# Altium PCB main.PcbDoc
Units mil, origin at the board's own origin, x right, y up, seen from the top; angles counter-clockwise.
Board outline 6000 x 4000 mil, 2 copper layers (Top Layer, Bottom Layer); 171 components, 206 nets, 905 pads, 0 vias.
Unrouted connection lines stored in the file: 298.
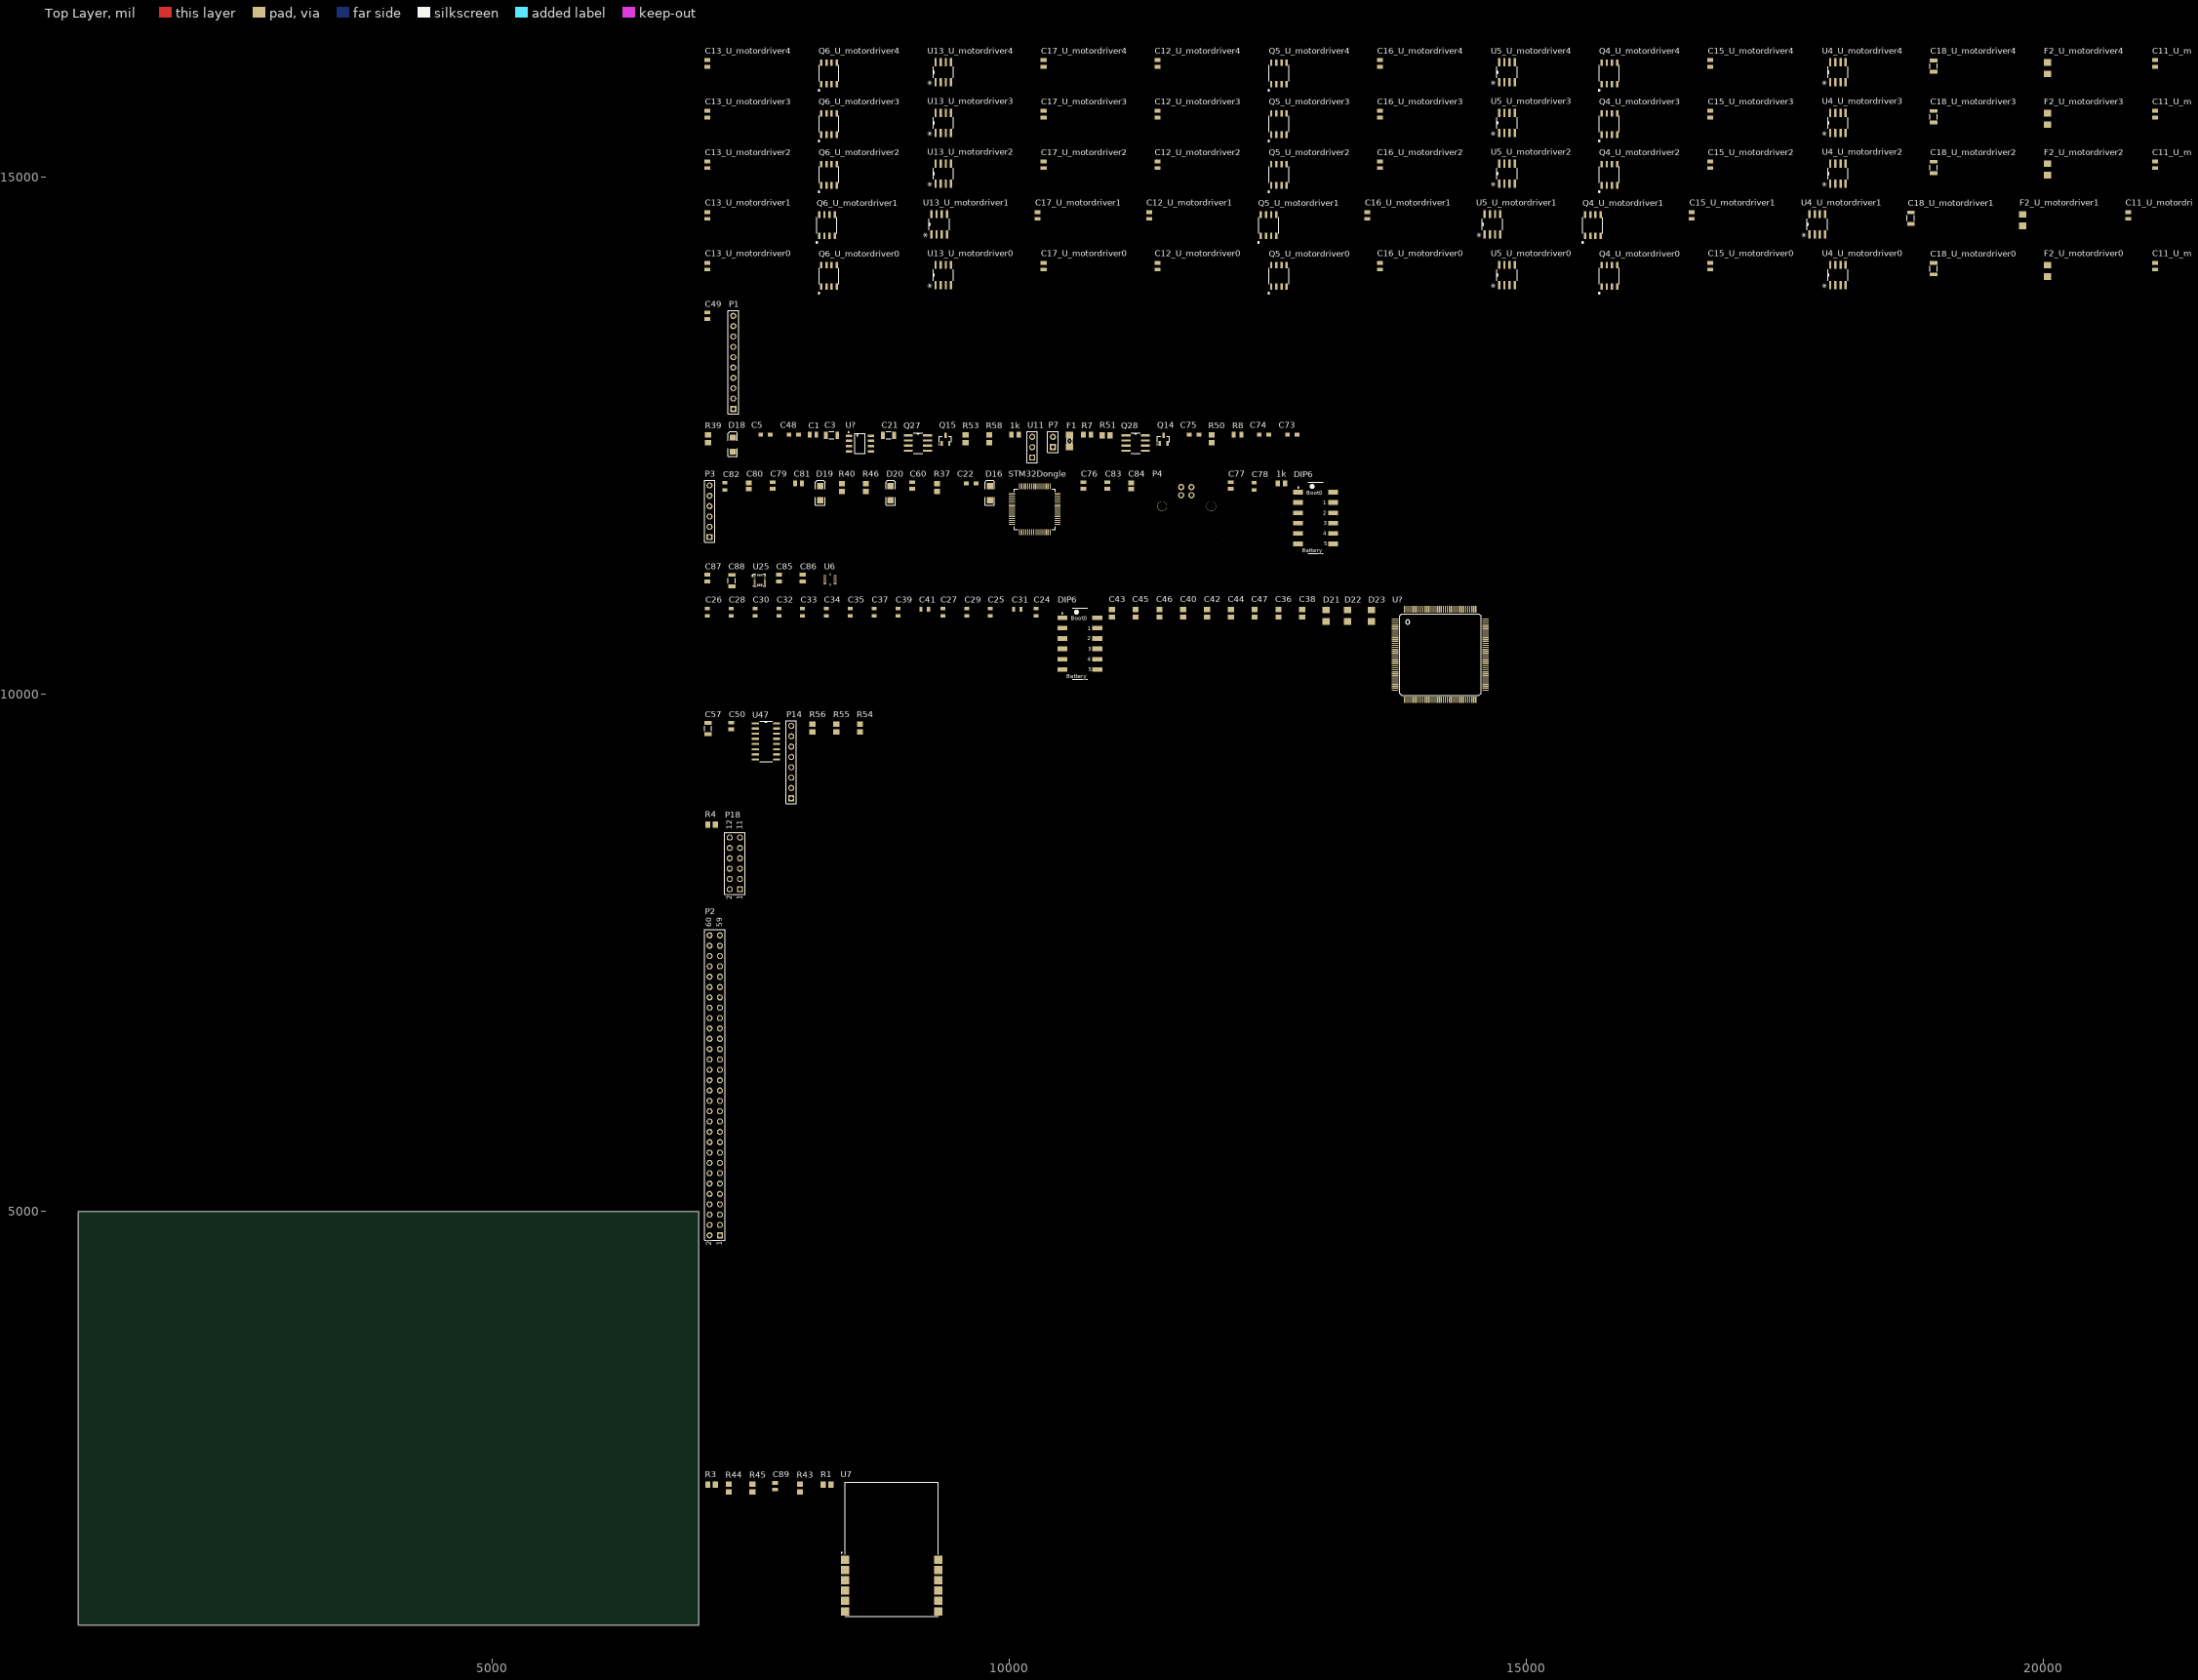
[diagram p0: Top Layer view]
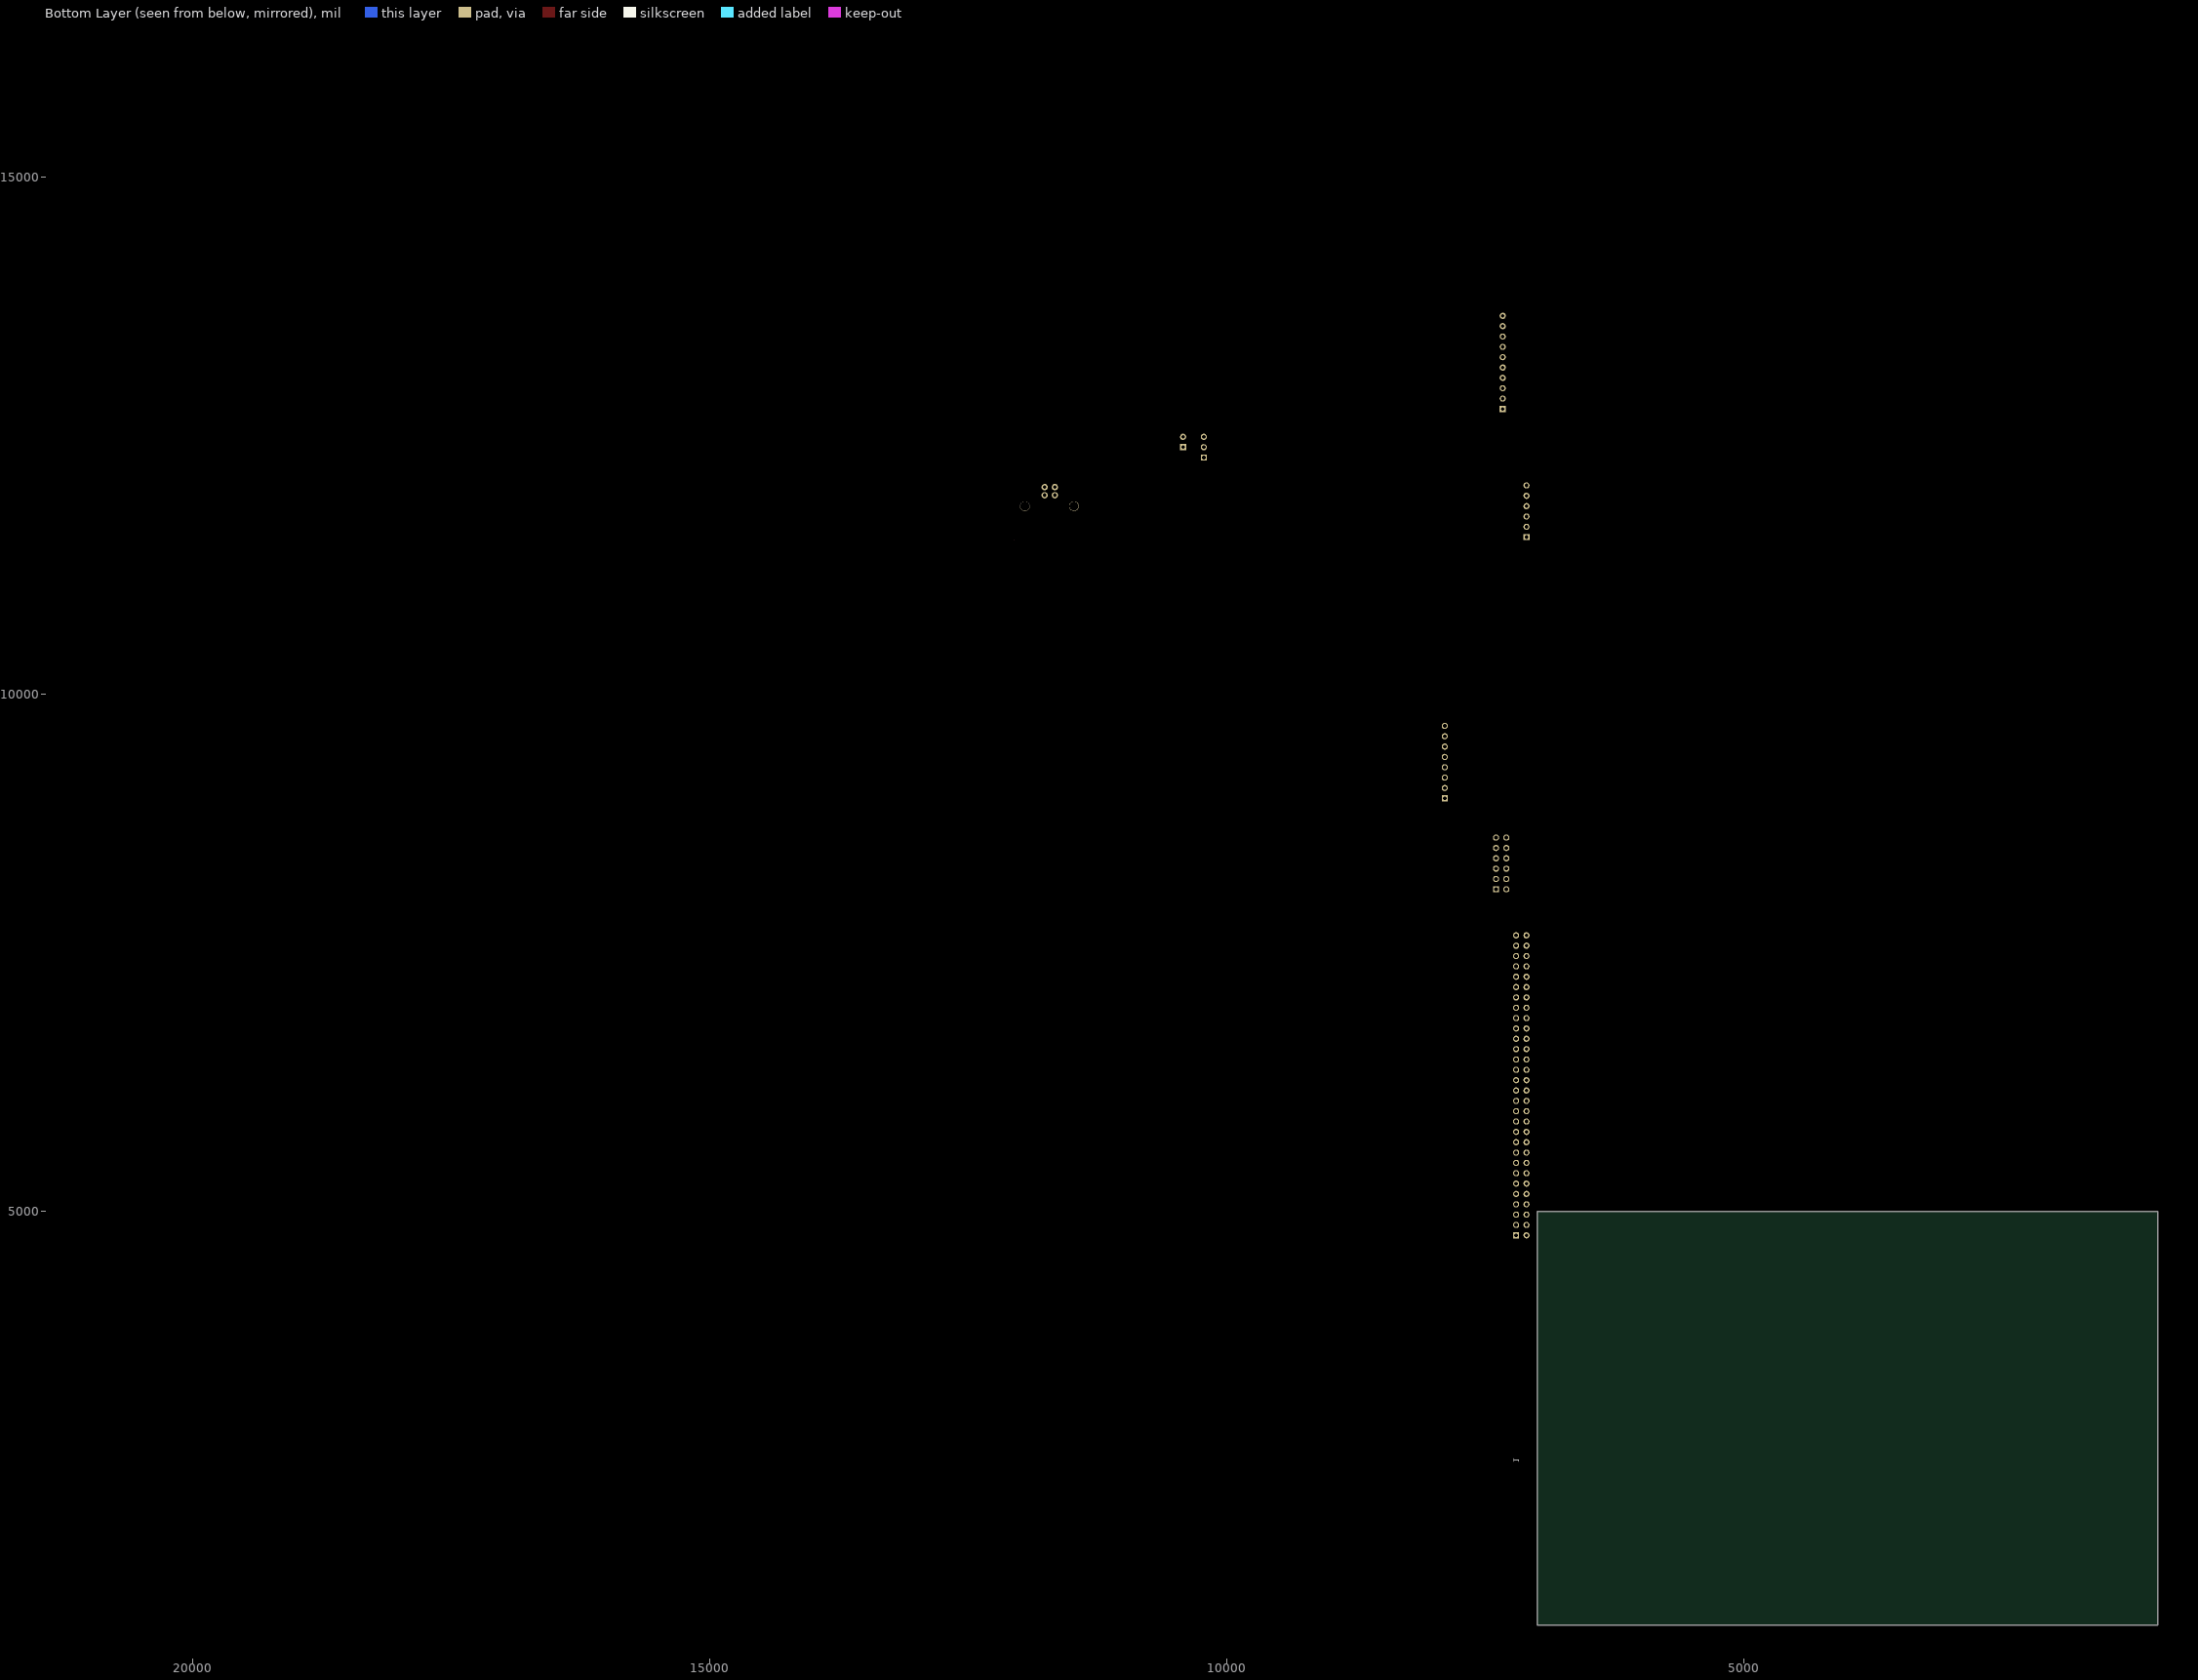
[diagram p1: Bottom Layer view, seen from below]

## Layer stack, top to bottom
Top Solder: solder mask 0.4, Solder Resist, Dk 3.5
Top Layer: signal copper 1.4
Dielectric 1: dielectric 12.6, FR-4, Dk 4.8
Bottom Layer: signal copper 1.4
Bottom Solder: solder mask 0.4, Solder Resist, Dk 3.5

## Board outline
1000,1000 7000,1000 7000,5000 1000,5000

## Design rules (kind name [scope] priority, off if disabled: settings)
Clearance [All] p1: gap=10
PolygonConnect [All] p1: connectstyle=Relief reliefconductorwidth=10 reliefentries=4 polygonreliefangle="90 Angle" airgapwidth=10
RoomDefinition U_sdcard [InComponentClass('U_sdcard')] p1: confinementstyle=ConfineIn formatcopy=TRUE lockcomponents=FALSE outline 7045,12700 7395,12700 7395,13820 7045,13820
RoomDefinition U_Power [InComponentClass('U_Power')] p2: confinementstyle=ConfineIn formatcopy=TRUE lockcomponents=FALSE outline 7045,9905 14650,9905 14650,12650 7045,12650
RoomDefinition U_motordriver4 [InComponentClass('U_motordriver4')] p3: confinementstyle=ConfineIn formatcopy=TRUE lockcomponents=FALSE outline 7045,15825 22095,15825 22095,16270 7045,16270
RoomDefinition U_motordriver3 [InComponentClass('U_motordriver3')] p4: confinementstyle=ConfineIn formatcopy=TRUE lockcomponents=FALSE outline 7045,15335 22095,15335 22095,15780 7045,15780
RoomDefinition U_motordriver2 [InComponentClass('U_motordriver2')] p5: confinementstyle=ConfineIn formatcopy=TRUE lockcomponents=FALSE outline 7045,14845 22095,14845 22095,15290 7045,15290
RoomDefinition U_motordriver1 [InComponentClass('U_motordriver1')] p6: confinementstyle=ConfineIn formatcopy=TRUE lockcomponents=FALSE outline 7045,14355 21815,14355 21815,14800 7045,14800
RoomDefinition U_motordriver0 [InComponentClass('U_motordriver0')] p7: confinementstyle=ConfineIn formatcopy=TRUE lockcomponents=FALSE outline 7045,13865 22095,13865 22095,14310 7045,14310
RoomDefinition U_microcontroller [InComponentClass('U_microcontroller')] p8: confinementstyle=ConfineIn formatcopy=TRUE lockcomponents=FALSE outline 7045,10115 13195,10115 13195,12650 7045,12650
RoomDefinition U_IMU [InComponentClass('U_IMU')] p9: confinementstyle=ConfineIn formatcopy=TRUE lockcomponents=FALSE outline 7045,11015 8345,11015 8345,11285 7045,11285
RoomDefinition U_fpga [InComponentClass('U_fpga')] p10: confinementstyle=ConfineIn formatcopy=TRUE lockcomponents=FALSE outline 7045,9905 14650,9905 14650,12650 7045,12650
RoomDefinition U_dribblerconn [InComponentClass('U_dribblerconn')] p11: confinementstyle=ConfineIn formatcopy=TRUE lockcomponents=FALSE outline 7045,8935 8710,8935 8710,9855 7045,9855
RoomDefinition U_chicker [InComponentClass('U_chicker')] p12: confinementstyle=ConfineIn formatcopy=TRUE lockcomponents=FALSE outline 7045,8000 7460,8000 7460,8885 7045,8885
RoomDefinition U_breakoutconn [InComponentClass('U_breakoutconn')] p13: confinementstyle=ConfineIn formatcopy=TRUE lockcomponents=FALSE outline 7045,2555 7265,2555 7265,7950 7045,7950
RoomDefinition main [InComponentClass('main')] p14: confinementstyle=ConfineIn formatcopy=TRUE lockcomponents=FALSE outline 7045,1060 9375,1060 9375,2505 7045,2505
RoutingVias [All] p1: holewidth=28 width=50 viastyle="Through Hole" minholewidth=28 minwidth=50 maxholewidth=28 maxwidth=50
SolderMaskExpansion [All] p1: expansion=4
Width [All] p1: maxlimit=10 minlimit=10 preferedwidth=10
30 further rules are at their usual default settings.

## Classes and differential pairs
channel class motordriver: U_motordriver0 U_motordriver1 U_motordriver2 U_motordriver3 U_motordriver4
component class U_sdcard: C49 P1
component class U_Power: 1k C1 C3 C5 C14 C21 C48 C73 C74 C75 D3 D18 D24 F1 P7 Q14 Q15 Q27 Q28 R6 R7 R8 R39 R50 R51 R53 R58 Toggle U10 U11 U23 U?
component class U_motordriver4: C11_U_motordriver4 C12_U_motordriver4 C13_U_motordriver4 C15_U_motordriver4 C16_U_motordriver4 C17_U_motordriver4 C18_U_motordriver4 F2_U_motordriver4 Q4_U_motordriver4 Q5_U_motordriver4 Q6_U_motordriver4 U4_U_motordriver4 U5_U_motordriver4 U13_U_motordriver4
component class U_motordriver3: C11_U_motordriver3 C12_U_motordriver3 C13_U_motordriver3 C15_U_motordriver3 C16_U_motordriver3 C17_U_motordriver3 C18_U_motordriver3 F2_U_motordriver3 Q4_U_motordriver3 Q5_U_motordriver3 Q6_U_motordriver3 U4_U_motordriver3 U5_U_motordriver3 U13_U_motordriver3
component class U_motordriver2: C11_U_motordriver2 C12_U_motordriver2 C13_U_motordriver2 C15_U_motordriver2 C16_U_motordriver2 C17_U_motordriver2 C18_U_motordriver2 F2_U_motordriver2 Q4_U_motordriver2 Q5_U_motordriver2 Q6_U_motordriver2 U4_U_motordriver2 U5_U_motordriver2 U13_U_motordriver2
component class U_motordriver1: C11_U_motordriver1 C12_U_motordriver1 C13_U_motordriver1 C15_U_motordriver1 C16_U_motordriver1 C17_U_motordriver1 C18_U_motordriver1 F2_U_motordriver1 Q4_U_motordriver1 Q5_U_motordriver1 Q6_U_motordriver1 U4_U_motordriver1 U5_U_motordriver1 U13_U_motordriver1
component class U_motordriver0: C11_U_motordriver0 C12_U_motordriver0 C13_U_motordriver0 C15_U_motordriver0 C16_U_motordriver0 C17_U_motordriver0 C18_U_motordriver0 F2_U_motordriver0 Q4_U_motordriver0 Q5_U_motordriver0 Q6_U_motordriver0 U4_U_motordriver0 U5_U_motordriver0 U13_U_motordriver0
component class U_microcontroller: 1k C22 C60 C76 C77 C78 C79 C80 C81 C82 C83 C84 D16 D19 D20 DIP6 P3 P4 R37 R40 R46 STM32Dongle
component class U_IMU: C85 C86 C87 C88 U6 U25
component class U_fpga: C24 C25 C26 C27 C28 C29 C30 C31 C32 C33 C34 C35 C36 C37 C38 C39 C40 C41 C42 C43 C44 C45 C46 C47 D21 D22 D23 DIP6 U?
component class U_dribblerconn: C50 C57 P14 R54 R55 R56 U47
component class U_chicker: P18 R4
component class U_breakoutconn: P2
component class main: C89 R1 R3 R43 R44 R45 U7

## Components (designator, comment, footprint, x,y, rotation, side; value= is the part's Value field where it differs from the comment)
1k "R2" CAPC2012X140N 12635,12040 r0 top
1k "R52" CAPC2012X140N 10060,12510 r0 top
C1 "100nF" CAPC2013X110N 8105,12510 r0 top
C3 "10uF" CAPC3216X100N 8285,12505 r0 top
C5 "1uF" INDC2012X87N 7645,12510 r0 top
C11_U_motordriver0 "100nF" CAPC2013X110N 21080,14140 r90 top (schematic designator C11)
C11_U_motordriver1 "100nF" CAPC2013X110N 20820,14630 r90 top (schematic designator C11)
C11_U_motordriver2 "100nF" CAPC2013X110N 21080,15120 r90 top (schematic designator C11)
C11_U_motordriver3 "100nF" CAPC2013X110N 21080,15610 r90 top (schematic designator C11)
C11_U_motordriver4 "100nF" CAPC2013X110N 21080,16100 r90 top (schematic designator C11)
C12_U_motordriver0 "100nF" CAPC2013X110N 11435,14140 r90 top (schematic designator C12)
C12_U_motordriver1 "100nF" CAPC2013X110N 11355,14630 r90 top (schematic designator C12)
C12_U_motordriver2 "100nF" CAPC2013X110N 11435,15120 r90 top (schematic designator C12)
C12_U_motordriver3 "100nF" CAPC2013X110N 11435,15610 r90 top (schematic designator C12)
C12_U_motordriver4 "100nF" CAPC2013X110N 11435,16100 r90 top (schematic designator C12)
C13_U_motordriver0 "100nF" CAPC2013X110N 7085,14140 r90 top (schematic designator C13)
C13_U_motordriver1 "100nF" CAPC2013X110N 7085,14630 r90 top (schematic designator C13)
C13_U_motordriver2 "100nF" CAPC2013X110N 7085,15120 r90 top (schematic designator C13)
C13_U_motordriver3 "100nF" CAPC2013X110N 7085,15610 r90 top (schematic designator C13)
C13_U_motordriver4 "100nF" CAPC2013X110N 7085,16100 r90 top (schematic designator C13)
C15_U_motordriver0 "100nF" CAPC2013X110N 16780,14140 r90 top (schematic designator C15)
C15_U_motordriver1 "100nF" CAPC2013X110N 16600,14630 r90 top (schematic designator C15)
C15_U_motordriver2 "100nF" CAPC2013X110N 16780,15120 r90 top (schematic designator C15)
C15_U_motordriver3 "100nF" CAPC2013X110N 16780,15610 r90 top (schematic designator C15)
C15_U_motordriver4 "100nF" CAPC2013X110N 16780,16100 r90 top (schematic designator C15)
C16_U_motordriver0 "100nF" CAPC2013X110N 13585,14140 r90 top (schematic designator C16)
C16_U_motordriver1 "100nF" CAPC2013X110N 13465,14630 r90 top (schematic designator C16)
C16_U_motordriver2 "100nF" CAPC2013X110N 13585,15120 r90 top (schematic designator C16)
C16_U_motordriver3 "100nF" CAPC2013X110N 13585,15610 r90 top (schematic designator C16)
C16_U_motordriver4 "100nF" CAPC2013X110N 13585,16100 r90 top (schematic designator C16)
C17_U_motordriver0 "100nF" CAPC2013X110N 10335,14140 r90 top (schematic designator C17)
C17_U_motordriver1 "100nF" CAPC2013X110N 10275,14630 r90 top (schematic designator C17)
C17_U_motordriver2 "100nF" CAPC2013X110N 10335,15120 r90 top (schematic designator C17)
C17_U_motordriver3 "100nF" CAPC2013X110N 10335,15610 r90 top (schematic designator C17)
C17_U_motordriver4 "100nF" CAPC2013X110N 10335,16100 r90 top (schematic designator C17)
C18_U_motordriver0 "10uF" CAPC3216X100N 18940,14115 r90 top (schematic designator C18)
C18_U_motordriver1 "10uF" CAPC3216X100N 18720,14605 r90 top (schematic designator C18)
C18_U_motordriver2 "10uF" CAPC3216X100N 18940,15095 r90 top (schematic designator C18)
C18_U_motordriver3 "10uF" CAPC3216X100N 18940,15585 r90 top (schematic designator C18)
C18_U_motordriver4 "10uF" CAPC3216X100N 18940,16075 r90 top (schematic designator C18)
C21 "10uF" CAPC3216X100N 8835,12505 r0 top
C22 "1uF" INDC2012X87N 9635,12040 r0 top
C24 "4.7uF" 0805 10260,10795 r90 top
C25 "4.7uF" 0805 9820,10795 r90 top
C26 "4.7uF" 0805 7085,10795 r90 top
C27 "4.7uF" 0805 9360,10795 r90 top
C28 "4.7uF" 0805 7315,10795 r90 top
C29 "4.7uF" 0805 9590,10795 r90 top
C30 "4.7uF" 0805 7545,10795 r90 top
C31 "4.7uF" 0805 10080,10825 r0 top
C32 "4.7uF" 0805 7775,10795 r90 top
C33 "4.7uF" 0805 8005,10795 r90 top
C34 "4.7uF" 0805 8235,10795 r90 top
C35 "4.7uF" 0805 8465,10795 r90 top
C36 "470nF" CAPC2012X70 12605,10785 r90 top
C37 "4.7uF" 0805 8695,10795 r90 top
C38 "470nF" CAPC2012X70 12835,10785 r90 top
C39 "4.7uF" 0805 8925,10795 r90 top
C40 "470nF" CAPC2012X70 11685,10785 r90 top
C41 "4.7uF" 0805 9185,10825 r0 top
C42 "470nF" CAPC2012X70 11915,10785 r90 top
C43 "470nF" CAPC2012X70 10995,10785 r90 top
C44 "470nF" CAPC2012X70 12145,10785 r90 top
C45 "470nF" CAPC2012X70 11225,10785 r90 top
C46 "470nF" CAPC2012X70 11455,10785 r90 top
C47 "470nF" CAPC2012X70 12375,10785 r90 top
C48 "1uF" INDC2012X87N 7920,12510 r0 top
C49 "100nF" CAPC2013X110N 7085,13660 r90 top
C50 "100nF" CAPC2013X110N 7315,9695 r90 top
C57 "10uF" CAPC3216X100N 7090,9670 r90 top
C60 "100nF" CAPC2013X110N 9065,12020 r90 top
C73 "1uF" INDC2012X87N 12740,12510 r0 top
C74 "1uF" INDC2012X87N 12465,12510 r0 top
C75 "1uF" INDC2012X87N 11790,12510 r0 top
C76 "100nF" CAPC2013X110N 10720,12020 r90 top
C77 "100nF" CAPC2013X110N 12145,12020 r90 top
C78 "4.7uF" 0805 12370,12010 r90 top
C79 "100nF" CAPC2013X110N 7715,12020 r90 top
C80 "2.2uF 0805" C0805 7485,12015 r90 top
C81 "100nF" CAPC2013X110N 7965,12040 r0 top
C82 "4.7uF" 0805 7255,12010 r90 top
C83 "100nF" CAPC2013X110N 10950,12020 r90 top
C84 "2.2uF 0805" C0805 11180,12015 r90 top
C85 "100nF" CAPC2013X110N 7775,11125 r90 top
C86 "100nF" CAPC2013X110N 8005,11125 r90 top
C87 "100nF" CAPC2013X110N 7085,11125 r90 top
C88 "10uF" CAPC3216X100N 7320,11100 r90 top
C89 "100nF" CAPC2013X110N 7740,2345 r90 top
D16 "LED2" 3.2X1.6X1.1 9815,11945 r90 top
D18 "GREEN" 3.2X1.6X1.1 7330,12415 r90 top
D19 "LED2" 3.2X1.6X1.1 8175,11945 r90 top
D20 "LED2" 3.2X1.6X1.1 8855,11945 r90 top
D21 "LedYel - Test 0" 1206#1 13065,10760 r90 top
D22 "LedYel - Test 1" 1206#1 13275,10760 r90 top
D23 "LedYel - Test 2" 1206#1 13505,10760 r90 top
DIP6 "5pin1" SOJ254P980X912-12M 10685,10490 r0 top
DIP6 "Boot0" SOJ254P980X912-12M 12965,11705 r0 top
F1 "15A Fuse" 1206#2 10585,12450 r90 top
F2_U_motordriver0 "5AFast" 1206#3 20040,14095 r90 top (schematic designator F2)
F2_U_motordriver1 "5AFast" 1206#3 19800,14585 r90 top (schematic designator F2)
F2_U_motordriver2 "5AFast" 1206#3 20040,15075 r90 top (schematic designator F2)
F2_U_motordriver3 "5AFast" 1206#3 20040,15565 r90 top (schematic designator F2)
F2_U_motordriver4 "5AFast" 1206#3 20040,16055 r90 top (schematic designator F2)
P1 "Header 10" HDR1X10 7335,12760 r90 top
P2 "Header 30X2" HDR2X30 7205,4770 r90 top
P3 "Header 6" HDR1X6 7105,11520 r90 top
P4 "USB_B" PCBComponent_1 11155,11670 r0 top
P7 "BatteryIn" HDR1X2 10425,12390 r90 top
P14 "Header 8" HDR1X8 7895,8995 r90 top
P18 "Header 6X2" HDR2X6 7400,8115 r90 top
Q4_U_motordriver0 "Ao4882" SOIC127P490X600X175-8N 15805,14045 r90 top (schematic designator Q4)
Q4_U_motordriver1 "Ao4882" SOIC127P490X600X175-8N 15645,14535 r90 top (schematic designator Q4)
Q4_U_motordriver2 "Ao4882" SOIC127P490X600X175-8N 15805,15025 r90 top (schematic designator Q4)
Q4_U_motordriver3 "Ao4882" SOIC127P490X600X175-8N 15805,15515 r90 top (schematic designator Q4)
Q4_U_motordriver4 "Ao4882" SOIC127P490X600X175-8N 15805,16005 r90 top (schematic designator Q4)
Q5_U_motordriver0 "Ao4882" SOIC127P490X600X175-8N 12610,14045 r90 top (schematic designator Q5)
Q5_U_motordriver1 "Ao4882" SOIC127P490X600X175-8N 12510,14535 r90 top (schematic designator Q5)
Q5_U_motordriver2 "Ao4882" SOIC127P490X600X175-8N 12610,15025 r90 top (schematic designator Q5)
Q5_U_motordriver3 "Ao4882" SOIC127P490X600X175-8N 12610,15515 r90 top (schematic designator Q5)
Q5_U_motordriver4 "Ao4882" SOIC127P490X600X175-8N 12610,16005 r90 top (schematic designator Q5)
Q6_U_motordriver0 "Ao4882" SOIC127P490X600X175-8N 8260,14045 r90 top (schematic designator Q6)
Q6_U_motordriver1 "Ao4882" SOIC127P490X600X175-8N 8240,14535 r90 top (schematic designator Q6)
Q6_U_motordriver2 "Ao4882" SOIC127P490X600X175-8N 8260,15025 r90 top (schematic designator Q6)
Q6_U_motordriver3 "Ao4882" SOIC127P490X600X175-8N 8260,15515 r90 top (schematic designator Q6)
Q6_U_motordriver4 "Ao4882" SOIC127P490X600X175-8N 8260,16005 r90 top (schematic designator Q6)
Q14 "NMOS" SOT95P230X110-3N 11495,12465 r0 top
Q15 "NMOS" SOT95P230X110-3N 9385,12465 r0 top
Q27 "IRF9310TRPBFCT-ND" SOIC127P600X175-8N#1 9120,12430 r0 top
Q28 "IRF9310TRPBFCT-ND" SOIC127P600X175-8N#1 11225,12430 r0 top
R1 "10k" RESC2012X60 8240,2360 r0 top
R3 "100R" RESC2012X60 7125,2360 r0 top
R4 "100k" RESC2012X60 7125,8740 r0 top
R7 "1k" CAPC2012X140N 10755,12510 r0 top
R8 "1Mohm" RESC2013X65N 12210,12510 r0 top
R37 "100R" RESC2012X60 9305,12000 r90 top
R39 "100ohm" RESC2012X60 7090,12470 r90 top
R40 "100R" RESC2012X60 8385,12000 r90 top
R43 "100R" RESC2012X60 7980,2325 r90 top
R44 "10k" RESC2012X60 7290,2325 r90 top
R45 "2.2k" RESC2012X60 7520,2325 r90 top
R46 "100R" RESC2012X60 8615,12000 r90 top
R50 "10K" RESC2012X60 11960,12470 r90 top
R51 "10K" RESC2012X60 10940,12505 r0 top
R53 "10K" RESC2012X60 9580,12470 r90 top
R54 "10k" RESC2012X60 8560,9675 r90 top
R55 "10k" RESC2012X60 8330,9675 r90 top
R56 "10k" RESC2012X60 8100,9675 r90 top
R58 "10K" RESC2012X60 9810,12470 r90 top
STM32Dongle "U24" QFP50P1200X1200X160-64N 10250,11790 r90 top
U4_U_motordriver0 "LM5107MAX/NOPB" SOIC127P620X175-8N 18015,14055 r90 top (schematic designator U4)
U4_U_motordriver1 "LM5107MAX/NOPB" SOIC127P620X175-8N 17815,14545 r90 top (schematic designator U4)
U4_U_motordriver2 "LM5107MAX/NOPB" SOIC127P620X175-8N 18015,15035 r90 top (schematic designator U4)
U4_U_motordriver3 "LM5107MAX/NOPB" SOIC127P620X175-8N 18015,15525 r90 top (schematic designator U4)
U4_U_motordriver4 "LM5107MAX/NOPB" SOIC127P620X175-8N 18015,16015 r90 top (schematic designator U4)
U5_U_motordriver0 "LM5107MAX/NOPB" SOIC127P620X175-8N 14815,14055 r90 top (schematic designator U5)
U5_U_motordriver1 "LM5107MAX/NOPB" SOIC127P620X175-8N 14675,14545 r90 top (schematic designator U5)
U5_U_motordriver2 "LM5107MAX/NOPB" SOIC127P620X175-8N 14815,15035 r90 top (schematic designator U5)
U5_U_motordriver3 "LM5107MAX/NOPB" SOIC127P620X175-8N 14815,15525 r90 top (schematic designator U5)
U5_U_motordriver4 "LM5107MAX/NOPB" SOIC127P620X175-8N 14815,16015 r90 top (schematic designator U5)
U6 "BMG160" OFN50P300X300X100-12N 8270,11110 r0 top
U7 "MRF24J40MDT-I/RM" XCVR_MRF24J40MDT-I/RM 8865,1385 r0 top
U11 "Boost Converter" HDR1X3 10225,12290 r90 top
U13_U_motordriver0 "LM5107MAX/NOPB" SOIC127P620X175-8N 9365,14055 r90 top (schematic designator U13)
U13_U_motordriver1 "LM5107MAX/NOPB" SOIC127P620X175-8N 9325,14545 r90 top (schematic designator U13)
U13_U_motordriver2 "LM5107MAX/NOPB" SOIC127P620X175-8N 9365,15035 r90 top (schematic designator U13)
U13_U_motordriver3 "LM5107MAX/NOPB" SOIC127P620X175-8N 9365,15525 r90 top (schematic designator U13)
U13_U_motordriver4 "LM5107MAX/NOPB" SOIC127P620X175-8N 9365,16015 r90 top (schematic designator U13)
U25 "LIS3DHTR" LGA16R50P5X3_300X300X100N 7590,11105 r0 top
U47 "74HC4050D,653" SOIC127P600X175-16N 7650,9545 r0 top
U? "XC6SLX9TQG144" fpgaTQ144fpgaXC6SLX9-3TQG144CfpgaPrimary) 14170,10385 r0 top
U? "LD1117D33TR" SOIC127P600X175-8N#2 8560,12425 r0 top

## Footprints (in the part's own frame and the unit in brackets; to place one, negate y for a bottom-side part, rotate by r counter-clockwise, add the part's x,y. Pads: shape width x height; smd on the part's side, far side on the other; paste and mask are expansions set on the pad)
3.2X1.6X1.1 [mm] "SMT LED; 2 Flat Leads"
  rect 1.5x1.5 smd: 1(-1.75,0) 2(1.75,0)
  silkscreen extent -2.9,-1.15 3.2,1.15
0805 [mm]
  rect 0.8x1.2 smd: P1(-0.9,0) P2(0.9,0)
1206#1 [mm]
  rect 1.6x1.8 smd: P1(-1.4,0) P2(1.4,0)
1206#2 [mm]
  rect 1.6x1.803 smd: 1(-1.422,0) 2(1.422,0)
  silkscreen extent -0.55,-0.74 0.6,0.74
1206#3 [mm]
  rect 1.6x1.8 smd: Fusein(-1.4,0) Fuseout(1.4,0)
C0805 [mm] "Chip Capacitor, Body 2.0x1.3mm, IPC High Density"
  rect 1.1x1.4 smd: 1(-0.75,0) 2(0.75,0)
  body extent -1.1,-0.72 1.1,0.72, height 1.4
CAPC2012X70 [mm]
  rect 1.3x1.5 smd: 1(-0.95,0) 2(0.95,0)
CAPC2012X140N [mil]
  rect 44x57 smd: 1(-36,0) 2(36,0)
CAPC2013X110N [mil]
  rect 36x57 smd: 1(-32,0) 2(32,0)
CAPC3216X100N [mil]
  rect 36x71 smd: In(-55,0) Out(55,0)
  silkscreen extent -24,-35 24,35
fpgaTQ144fpgaXC6SLX9-3TQG144CfpgaPrimary) [mm]
  rect 1.6x0.3 smd: P1(-11.1,8.75) P2(-11.1,8.25) P3(-11.1,7.75) P4(-11.1,7.25) P5(-11.1,6.75) P6(-11.1,6.25) P7(-11.1,5.75) P8(-11.1,5.25) P9(-11.1,4.75) P10(-11.1,4.25) P11(-11.1,3.75) P12(-11.1,3.25) P13(-11.1,2.75) P14(-11.1,2.25) P15(-11.1,1.75) P16(-11.1,1.25) P17(-11.1,0.75) P18(-11.1,0.25) P19(-11.1,-0.25) P20(-11.1,-0.75) P21(-11.1,-1.25) P22(-11.1,-1.75) P23(-11.1,-2.25) P24(-11.1,-2.75) P25(-11.1,-3.25) P26(-11.1,-3.75) P27(-11.1,-4.25) P28(-11.1,-4.75) P29(-11.1,-5.25) P30(-11.1,-5.75) P31(-11.1,-6.25) P32(-11.1,-6.75) P33(-11.1,-7.25) P34(-11.1,-7.75) P35(-11.1,-8.25) P36(-11.1,-8.75) P73(11.1,-8.75) P74(11.1,-8.25) P75(11.1,-7.75) P76(11.1,-7.25) P77(11.1,-6.75) P78(11.1,-6.25) P79(11.1,-5.75) P80(11.1,-5.25) P81(11.1,-4.75) P82(11.1,-4.25) P83(11.1,-3.75) P84(11.1,-3.25) P85(11.1,-2.75) P86(11.1,-2.25) P87(11.1,-1.75) P88(11.1,-1.25) P89(11.1,-0.75) P90(11.1,-0.25) P91(11.1,0.25) P92(11.1,0.75) P93(11.1,1.25) P94(11.1,1.75) P95(11.1,2.25) P96(11.1,2.75) P97(11.1,3.25) P98(11.1,3.75) P99(11.1,4.25) P100(11.1,4.75) P101(11.1,5.25) P102(11.1,5.75) P103(11.1,6.25) P104(11.1,6.75) P105(11.1,7.25) P106(11.1,7.75) P107(11.1,8.25) P108(11.1,8.75)
  rect 0.3x1.6 smd: P37(-8.75,-11.1) P38(-8.25,-11.1) P39(-7.75,-11.1) P40(-7.25,-11.1) P41(-6.75,-11.1) P42(-6.25,-11.1) P43(-5.75,-11.1) P44(-5.25,-11.1) P45(-4.75,-11.1) P46(-4.25,-11.1) P47(-3.75,-11.1) P48(-3.25,-11.1) P49(-2.75,-11.1) P50(-2.25,-11.1) P51(-1.75,-11.1) P52(-1.25,-11.1) P53(-0.75,-11.1) P54(-0.25,-11.1) P55(0.25,-11.1) P56(0.75,-11.1) P57(1.25,-11.1) P58(1.75,-11.1) P59(2.25,-11.1) P60(2.75,-11.1) P61(3.25,-11.1) P62(3.75,-11.1) P63(4.25,-11.1) P64(4.75,-11.1) P65(5.25,-11.1) P66(5.75,-11.1) P67(6.25,-11.1) P68(6.75,-11.1) P69(7.25,-11.1) P70(7.75,-11.1) P71(8.25,-11.1) P72(8.75,-11.1) P109(8.75,11.1) P110(8.25,11.1) P111(7.75,11.1) P112(7.25,11.1) P113(6.75,11.1) P114(6.25,11.1) P115(5.75,11.1) P116(5.25,11.1) P117(4.75,11.1) P118(4.25,11.1) P119(3.75,11.1) P120(3.25,11.1) P121(2.75,11.1) P122(2.25,11.1) P123(1.75,11.1) P124(1.25,11.1) P125(0.75,11.1) P126(0.25,11.1) P127(-0.25,11.1) P128(-0.75,11.1) P129(-1.25,11.1) P130(-1.75,11.1) P131(-2.25,11.1) P132(-2.75,11.1) P133(-3.25,11.1) P134(-3.75,11.1) P135(-4.25,11.1) P136(-4.75,11.1) P137(-5.25,11.1) P138(-5.75,11.1) P139(-6.25,11.1) P140(-6.75,11.1) P141(-7.25,11.1) P142(-7.75,11.1) P143(-8.25,11.1) P144(-8.75,11.1)
  silkscreen extent -10,-10 10,10
HDR1X2 [mm] "Connector; Header; 2 Position"
  rect 1.5x1.5 hole 0.9: 1(0,0)
  round 1.5 hole 0.9: 2(2.54,0)
  silkscreen extent -1.27,-1.27 3.81,1.27
HDR1X3 [mm] "Connector; Header; 3 Position"
  rect 1.5x1.5 hole 0.9: 1(0,0)
  round 1.5 hole 0.9: 2(2.54,0) 3(5.08,0)
  silkscreen extent -1.27,-1.27 6.35,1.27
HDR1X6 [mm] "Connector; Header; 6 Position"
  rect 1.5x1.5 hole 0.9: 1(0,0)
  round 1.5 hole 0.9: 2(2.54,0) 3(5.08,0) 4(7.62,0) 5(10.16,0) 6(12.7,0)
  silkscreen extent -1.27,-1.27 13.97,1.27
HDR1X8 [mm] "Connector; Header; 8 Position"
  rect 1.5x1.5 hole 0.9: 1(0,0)
  round 1.5 hole 0.9: 2(2.54,0) 3(5.08,0) 4(7.62,0) 5(10.16,0) 6(12.7,0) 7(15.24,0) 8(17.78,0)
  silkscreen extent -1.27,-1.27 19.05,1.27
HDR1X10 [mm] "Connector; Header; 10 Position"
  rect 1.5x1.5 hole 0.9: 1(0,0)
  round 1.5 hole 0.9: 2(2.54,0) 3(5.08,0) 4(7.62,0) 5(10.16,0) 6(12.7,0) 7(15.24,0) 8(17.78,0) 9(20.32,0) 10(22.86,0)
  silkscreen extent -1.27,-1.27 24.13,1.27
HDR2X6 [mm] "Connector; Header; 6x2 Position"
  rect 1.5x1.5 hole 0.9: 1(0,0)
  round 1.5 hole 0.9: 2(0,2.54) 3(2.54,0) 4(2.54,2.54) 5(5.08,0) 6(5.08,2.54) 7(7.62,0) 8(7.62,2.54) 9(10.16,0) 10(10.16,2.54) 11(12.7,0) 12(12.7,2.54)
  silkscreen extent -1.27,-1.27 13.97,3.81
HDR2X30 [mm] "Connector; Header; 30x2 Position"
  rect 1.5x1.5 hole 0.9: 1(0,0)
  round 1.5 hole 0.9: 2(0,2.54) 3(2.54,0) 4(2.54,2.54) 5(5.08,0) 6(5.08,2.54) 7(7.62,0) 8(7.62,2.54) 9(10.16,0) 10(10.16,2.54) 11(12.7,0) 12(12.7,2.54) 13(15.24,0) 14(15.24,2.54) 15(17.78,0) 16(17.78,2.54) 17(20.32,0) 18(20.32,2.54) 19(22.86,0) 20(22.86,2.54) 21(25.4,0) 22(25.4,2.54) 23(27.94,0) 24(27.94,2.54) 25(30.48,0) 26(30.48,2.54) 27(33.02,0) 28(33.02,2.54) 29(35.56,0) 30(35.56,2.54) 31(38.1,0) 32(38.1,2.54) 33(40.64,0) 34(40.64,2.54) 35(43.18,0) 36(43.18,2.54) 37(45.72,0) 38(45.72,2.54) 39(48.26,0) 40(48.26,2.54) 41(50.8,0) 42(50.8,2.54) 43(53.34,0) 44(53.34,2.54) 45(55.88,0) 46(55.88,2.54) 47(58.42,0) 48(58.42,2.54) 49(60.96,0) 50(60.96,2.54) 51(63.5,0) 52(63.5,2.54) 53(66.04,0) 54(66.04,2.54) 55(68.58,0) 56(68.58,2.54) 57(71.12,0) 58(71.12,2.54) 59(73.66,0) 60(73.66,2.54)
  silkscreen extent -1.27,-1.27 75.06,3.81
INDC2012X87N [mm]
  rect 1.15x1 smd: 1(-1.175,0) 2(1.175,0)
LGA16R50P5X3_300X300X100N [mm]
  rect 0.52x0.35 smd: 1(-1.225,1) 2(-1.225,0.5) 3(-1.225,0) 4(-1.225,-0.5) 5(-1.225,-1) 9(1.225,-1) 10(1.225,-0.5) 11(1.225,0) 12(1.225,0.5) 13(1.225,1)
  rect 0.35x0.52 smd: 6(-0.5,-1.225) 7(0,-1.225) 8(0.5,-1.225) 14(0.5,1.225) 15(0,1.225) 16(-0.5,1.225)
  silkscreen extent -1.93,-1.5 1.5,1.5
OFN50P300X300X100-12N [mm]
  rect 0.675x0.25 smd: 1(-1.263,1) 2(-1.263,0.5) 3(-1.263,0) 4(-1.263,-0.5) 5(-1.263,-1) 7(1.263,-1) 8(1.263,-0.5) 9(1.263,0) 10(1.263,0.5) 11(1.263,1)
  rect 0.25x0.675 smd: 6(-0.001,-1.263) 12(0,1.262)
PCBComponent_1 [mil]
  round 60 hole 36.22: 1(608.43,333.62) 2(510,333.74) 3(510,255) 4(608.43,255)
  round 94.49 hole 90.55: 5(325,150) 5(800,150)
  Top Layer lines w10: 900,-179.45 900.28,-179.72
QFP50P1200X1200X160-64N [mil]
  rect 58x11 smd: 1(-221,148) 2(-221,128) 5(-221,69) 7(-221,30) 12(-221,-69) 14(-221,-108) 15(-221,-128) 16(-221,-148) 33(221,-148) 34(221,-128) 35(221,-108) 37(221,-69) 38(221,-49) 40(221,-10) 41(221,10) 42(221,30) 44(221,69) 45(221,89) 47(221,128) 48(221,148)
  rect 58x9 smd: 3(-221,108) 4(-221,89) 8(-221,10) 9(-221,-10) 10(-221,-30) 11(-221,-49) 13(-221,-89) 36(221,-89) 39(221,-30) 43(221,49) 46(221,108)
  rect 58x8 smd: 6(-221,49)
  rect 11x58 smd: 17(-148,-221) 18(-128,-221) 20(-89,-221) 21(-69,-221) 22(-49,-221) 24(-10,-221) 25(10,-221) 26(30,-221) 28(69,-221) 29(89,-221) 31(128,-221) 32(148,-221) 49(148,221) 50(128,221) 52(89,221) 53(69,221) 55(30,221) 56(10,221) 57(-10,221) 59(-49,221) 60(-69,221) 62(-108,221) 63(-128,221) 64(-148,221)
  rect 9x58 smd: 19(-108,-221) 23(-30,-221) 27(49,-221) 30(108,-221) 51(108,221) 54(49,221) 58(-30,221) 61(-89,221)
  silkscreen extent -197,-197 197,197
RESC2012X60 [mm]
  rect 1.3x1.5 smd: 1(-0.95,0) 2(0.95,0)
RESC2013X65N [mil]
  rect 40x55 smd: 1(-37,0) 2(37,0)
SOIC127P490X600X175-8N [mm]
  rect 1.58x0.59 smd: D1(2.625,-1.905) D1A(2.625,-0.635) D2(2.625,1.905) D2A(2.625,0.635) G1(-2.625,-1.905) G2(-2.625,0.635) S1(-2.625,-0.635) S2(-2.625,1.905)
  silkscreen extent -4.4,-2.45 1.95,2.69
SOIC127P600X175-8N#1 [mil]
  rect 86x22 smd: 1(-93,75) 2(-93,25) 3(-93,-25) 4(-93,-75) 5(93,-75) 6(93,-25) 7(93,25) 8(93,75)
  silkscreen extent -46,-98 46,99
SOIC127P600X175-8N#2 [mil]
  rect 61.02x23.62 smd: 1(-106.3,75) 2(-106.3,25) 3(-106.3,-25) 4(-106.3,-75) 5(106.3,-75) 6(106.3,-25) 7(106.3,25) 8(106.3,75)
  silkscreen extent -114,-96 50,114
SOIC127P600X175-16N [mil]
  rect 67x21 smd: 1(-102,175) 2(-102,125) 3(-102,75) 4(-102,25) 5(-102,-25) 6(-102,-75) 7(-102,-125) 8(-102,-175) 9(102,-175) 10(102,-125) 11(102,-75) 12(102,-25) 13(102,25) 14(102,75) 15(102,125) 16(102,175)
  silkscreen extent -62,-197 62,197
SOIC127P620X175-8N [mil]
  rect 78x22 smd: 1(-97,75) 2(-97,25) 3(-97,-25) 4(-97,-75) 5(97,-75) 6(97,-25) 7(97,25) 8(97,75)
  silkscreen extent -54,-98 54,99
SOJ254P980X912-12M [mm] "SOJ, 12-Leads, Body 17.50x9.75mm, Pitch 2.54mm, IPC Low Density"
  rect 2.44x1.13 smd: 1(-4.3,6.35) 2(-4.3,3.81) 3(-4.3,1.27) 4(-4.3,-1.27) 5(-4.3,-3.81) 6(-4.3,-6.35) 7(4.3,-6.35) 8(4.3,-3.81) 9(4.3,-1.27) 10(4.3,1.27) 11(4.3,3.81) 12(4.3,6.35)
  silkscreen extent -4.42,-8.75 1.85,8.75, body extent -4.89,-8.75 4.89,8.75, height 9.12
SOT95P230X110-3N [mm]
  rect 0.59x1.26 smd: 1(-0.95,-0.98) 2(0.95,-0.98) 3(0,0.98)
  silkscreen extent -1.65,-1.3 1.5,0.7
XCVR_MRF24J40MDT-I/RM [mil]
  rect 80x80 smd: 1(-450,250) 2(-450,150) 3(-450,50) 4(-450,-50) 5(-450,-150) 6(-450,-250) 7(450,-250) 8(450,-150) 9(450,-50) 10(450,50) 11(450,150) 12(450,250)
  silkscreen extent -486,-300 450,1000

## Part data
1k 1k R7: library part 1kohm, "1276-5272-1-ND"
C1 C11_U_motordriver0 C11_U_motordriver1 C11_U_motordriver2 C11_U_motordriver3 C11_U_motordriver4 C12_U_motordriver0 C12_U_motordriver1 C12_U_motordriver2 C12_U_motordriver3 C12_U_motordriver4 C13_U_motordriver0 C13_U_motordriver1 C13_U_motordriver2 C13_U_motordriver3 C13_U_motordriver4 C15_U_motordriver0 C15_U_motordriver1 C15_U_motordriver2 C15_U_motordriver3 C15_U_motordriver4 C16_U_motordriver0 C16_U_motordriver1 C16_U_motordriver2 C16_U_motordriver3 C16_U_motordriver4 C17_U_motordriver0 C17_U_motordriver1 C17_U_motordriver2 C17_U_motordriver3 C17_U_motordriver4 C49 C50 C60 C76 C77 C79 C81 C83 C85 C86 C87 C89: library part C0805C104K5RACTU, "Capacitor; Ceramic; Cap; .100UF ; Tol+-10%; SMD; Vol-Rtg 50V; X7R, Tape/Reel"
C3 C18_U_motordriver0 C18_U_motordriver1 C18_U_motordriver2 C18_U_motordriver3 C18_U_motordriver4 C21 C57 C88 F1 P4 U?: library part Component_1
C5 C22 C48 C73 C74 C75: library part C2012X5R1E105M085AC, "CAP CER 1UF 25V X5R 0805"
C36 C38 C40 C42 C43 C44 C45 C46 C47: library part CC0805KKX7R8BB474, "0805 0.47 uF 25 V ±10 % Tolerance X7R SMT Multilayer Ceramic Capacitor"
C80 C84: library part "Cap Pol3", "Polarized Capacitor (Surface Mount)"
D16 D19 D20: "Typical RED, GREEN, YELLOW, AMBER GaAs LED"
D18: library part LED2, "Typical RED, GREEN, YELLOW, AMBER GaAs LED"
D21 D22 D23: library part LedYel
F2_U_motordriver0 F2_U_motordriver1 F2_U_motordriver2 F2_U_motordriver3 F2_U_motordriver4: library part 5AFast1206
P1: "Header, 10-Pin"
P2: "Header, 30-Pin, Dual row"
P3: "Header, 6-Pin"
P7: library part "Header 2", "Header, 2-Pin"
P14: "Header, 8-Pin"
P18: "Header, 6-Pin, Dual row"
R1 R44 R45 R50 R51 R53 R54 R55 R56 R58: library part RC0805FR-0710KL, "RES SMD 10K OHM 1% 1/8W 0805"
R3 R37 R39 R40 R43 R46: library part RC0805FR-07100RL, "RES SMD 100 OHM 1% 1/8W 0805"
R4: library part RC0805FR-07100RL, "RES SMD 100k OHM 1% 1/8W 0805"
R8: "RES SMD 1M OHM 1% 1/8W 0805"
STM32Dongle: library part STM32Dongle, "497-11907-ND"
U4_U_motordriver0 U4_U_motordriver1 U4_U_motordriver2 U4_U_motordriver3 U4_U_motordriver4 U5_U_motordriver0 U5_U_motordriver1 U5_U_motordriver2 U5_U_motordriver3 U5_U_motordriver4 U13_U_motordriver0 U13_U_motordriver1 U13_U_motordriver2 U13_U_motordriver3 U13_U_motordriver4: "MOSFET DRVR 1.4A 2-OUT Hi/Lo Side Full Brdg/Half Brdg Non-Inv 8-Pin SOIC N T/R"
U6: "BMG160 Series 16 Bit 2000°/s 3-Axis Angular Rate Gyroscope Sensor 3 mm x 3 mm"
U7: "2.4 GHz IEEE 802.15.4 Certified Transceiver Module (+20 dBm), 12 MODULE Varies T/R"
U11: library part "Header 3", "Header, 3-Pin"
U25: "MEMS digital output motion sensor ultra low-power high performance 3-axes"
U47: "74HC Series 6 V Surface Mount Hex High-to-Low Level Shifter - SOIC-16"
U?: "IC REG LINEAR 3.3V 800MA 8SO"

## Nets (pads, with @x,y where several pads share a name; then routed paths per layer and width w, separated by ;. In a path a pad name is that pad's centre, name@x,y a point inside that pad or via, vN(x,y) a via of type N, cw(c..) or ccw(c..) an arc to the next point about the centre after c; other vN are vias at no path point)
5V: C1.2 U11.3 U?.4
9V: C11_U_motordriver0.1 C11_U_motordriver1.1 C11_U_motordriver2.1 C11_U_motordriver3.1 C11_U_motordriver4.1 C12_U_motordriver0.2 C12_U_motordriver1.2 C12_U_motordriver2.2 C12_U_motordriver3.2 C12_U_motordriver4.2 C13_U_motordriver0.2 C13_U_motordriver1.2 C13_U_motordriver2.2 C13_U_motordriver3.2 C13_U_motordriver4.2 C74.2 U13_U_motordriver0.1 U13_U_motordriver1.1 U13_U_motordriver2.1 U13_U_motordriver3.1 U13_U_motordriver4.1
+5V: C57.Out P2.28 P14.4
+BATT: C73.2 C75.2 P18.1 P18.2 Q28.5 Q28.6 Q28.7 Q28.8 R1.2 U11.1
ACCEL_MISO: U25.7
BB_SENSOR: P2.1 STM32Dongle.24
GYRO_CLK: U6.7
GYRO_CS: U6.5
HB0_U_motordriver0: U4_U_motordriver0.8
HB0_U_motordriver1: U4_U_motordriver1.8
HB0_U_motordriver2: U4_U_motordriver2.8
HB0_U_motordriver3: U4_U_motordriver3.8
HB0_U_motordriver4: U4_U_motordriver4.8
HB1_U_motordriver0: U5_U_motordriver0.8
HB1_U_motordriver1: U5_U_motordriver1.8
HB1_U_motordriver2: U5_U_motordriver2.8
HB1_U_motordriver3: U5_U_motordriver3.8
HB1_U_motordriver4: U5_U_motordriver4.8
HB2_U_motordriver0: U13_U_motordriver0.8
HB2_U_motordriver1: U13_U_motordriver1.8
HB2_U_motordriver2: U13_U_motordriver2.8
HB2_U_motordriver3: U13_U_motordriver3.8
HB2_U_motordriver4: U13_U_motordriver4.8
HG0_U_motordriver0: U4_U_motordriver0.7
HG0_U_motordriver1: U4_U_motordriver1.7
HG0_U_motordriver2: U4_U_motordriver2.7
HG0_U_motordriver3: U4_U_motordriver3.7
HG0_U_motordriver4: U4_U_motordriver4.7
HG1_U_motordriver0: U5_U_motordriver0.7
HG1_U_motordriver1: U5_U_motordriver1.7
HG1_U_motordriver2: U5_U_motordriver2.7
HG1_U_motordriver3: U5_U_motordriver3.7
HG1_U_motordriver4: U5_U_motordriver4.7
HIGH0_U_motordriver0: U4_U_motordriver0.2
HIGH0_U_motordriver1: U4_U_motordriver1.2
HIGH0_U_motordriver2: U4_U_motordriver2.2
HIGH0_U_motordriver3: U4_U_motordriver3.2
HIGH0_U_motordriver4: U4_U_motordriver4.2
HIGH1_U_motordriver0: U5_U_motordriver0.2
HIGH1_U_motordriver1: U5_U_motordriver1.2
HIGH1_U_motordriver2: U5_U_motordriver2.2
HIGH1_U_motordriver3: U5_U_motordriver3.2
HIGH1_U_motordriver4: U5_U_motordriver4.2
HIGH2_U_motordriver0: U13_U_motordriver0.2
HIGH2_U_motordriver1: U13_U_motordriver1.2
HIGH2_U_motordriver2: U13_U_motordriver2.2
HIGH2_U_motordriver3: U13_U_motordriver3.2
HIGH2_U_motordriver4: U13_U_motordriver4.2
HV_BATT_F_U_motordriver0: F2_U_motordriver0.Fusein
HV_BATT_F_U_motordriver1: F2_U_motordriver1.Fusein
HV_BATT_F_U_motordriver2: F2_U_motordriver2.Fusein
HV_BATT_F_U_motordriver3: F2_U_motordriver3.Fusein
HV_BATT_F_U_motordriver4: F2_U_motordriver4.Fusein
HVBATT: F2_U_motordriver0.Fuseout F2_U_motordriver1.Fuseout F2_U_motordriver2.Fuseout F2_U_motordriver3.Fuseout F2_U_motordriver4.Fuseout
LG0_U_motordriver0: U4_U_motordriver0.5
LG0_U_motordriver1: U4_U_motordriver1.5
LG0_U_motordriver2: U4_U_motordriver2.5
LG0_U_motordriver3: U4_U_motordriver3.5
LG0_U_motordriver4: U4_U_motordriver4.5
LG2_U_motordriver0: U13_U_motordriver0.5
LG2_U_motordriver1: U13_U_motordriver1.5
LG2_U_motordriver2: U13_U_motordriver2.5
LG2_U_motordriver3: U13_U_motordriver3.5
LG2_U_motordriver4: U13_U_motordriver4.5
LOW0_U_motordriver0: U4_U_motordriver0.3
LOW0_U_motordriver1: U4_U_motordriver1.3
LOW0_U_motordriver2: U4_U_motordriver2.3
LOW0_U_motordriver3: U4_U_motordriver3.3
LOW0_U_motordriver4: U4_U_motordriver4.3
LOW1_U_motordriver0: U5_U_motordriver0.3
LOW1_U_motordriver1: U5_U_motordriver1.3
LOW1_U_motordriver2: U5_U_motordriver2.3
LOW1_U_motordriver3: U5_U_motordriver3.3
LOW1_U_motordriver4: U5_U_motordriver4.3
LOW2_U_motordriver0: U13_U_motordriver0.3
LOW2_U_motordriver1: U13_U_motordriver1.3
LOW2_U_motordriver2: U13_U_motordriver2.3
LOW2_U_motordriver3: U13_U_motordriver3.3
LOW2_U_motordriver4: U13_U_motordriver4.3
LPS_DRIVE0: P2.45
LPS_DRIVE1: P2.47
LPS_DRIVE2: P2.49
LPS_DRIVE3: P2.51
LPS_SENSOR: P2.3 STM32Dongle.25
M0_ENCODER0: P2.43
M0_ENCODER1: P2.41
M0_HALL0: P2.37
M0_HALL1: P2.35
M0_HALL2: P2.39
M0_PHASE0: P2.46 P2.48
M0_PHASE1: P2.42 P2.44
M0_PHASE2: P2.38 P2.40
M1_ENCODER0: P2.33
M1_ENCODER1: P2.31
M1_HALL0: P2.27
M1_HALL1: P2.25
M1_HALL2: P2.29
M1_PHASE0: P2.58 P2.60
M1_PHASE1: P2.54 P2.56
M1_PHASE2: P2.50 P2.52
M2_ENCODER0: P2.23
M2_ENCODER1: P2.21
M2_HALL0: P2.17
M2_HALL1: P2.15
M2_HALL2: P2.19
M2_PHASE0: P2.12 P2.14
M2_PHASE1: P2.8 P2.10
M2_PHASE2: P2.2 P2.4 P2.6
M3_ENCODER0: P2.13
M3_ENCODER1: P2.11
M3_HALL0: P2.7
M3_HALL1: P2.5
M3_HALL2: P2.9
M3_PHASE0: P2.24 P2.26
M3_PHASE1: P2.20 P2.22
M3_PHASE2: P2.16 P2.18
MO_ENCODER1: STM32Dongle.55
Net1k_1: 1k.1@10024,12510 Q15.3
Net1k_2: 1k.2@10096,12510 Q27.4 R53.1
NetC75_1: C75.1 Q28.4
NetC84_1: C84.1 STM32Dongle.47
NetD3_1: Q27.5 Q27.6 Q27.7 Q27.8
NetD16_1: D16.1 R37.2
NetD18_1: D18.1 R39.2
NetD19_1: D19.1 R40.2
NetD20_1: D20.1 R46.2
NetF1_1: F1.1 P7.2
NetF1_2: F1.2 Q27.1 Q27.2 Q27.3 Q28.1 Q28.2 Q28.3 R51.1 R53.2
NetP2_30: P2.30 STM32Dongle.43
NetP4_1: P4.1 STM32Dongle.42
NetP4_2: P4.2 STM32Dongle.44
NetP14_6: P14.6 R54.1 U47.7
NetP14_7: P14.7 R55.1 U47.5
NetP14_8: P14.8 R56.1 U47.3
NetP18_5: P18.5 STM32Dongle.61
NetP18_6: P18.6 STM32Dongle.16
NetP18_8: P18.8 STM32Dongle.62
NetP18_11: P18.11 R4.2 STM32Dongle.11
NetQ14_1: Q14.1 R50.1 STM32Dongle.3
NetQ14_3: Q14.3 R51.2
NetQ15_1: Q15.1 R58.1 STM32Dongle.2
NetR1_1: R1.1 R44.2
NetR3_2: R3.2 R43.1
NetR6_1: R7.2
NetR8_2: R8.2
NetR37_1: R37.1 STM32Dongle.36
NetR40_1: R40.1 STM32Dongle.34
NetR44_1: R44.1 R45.1 STM32Dongle.10
NetR46_1: R46.1 STM32Dongle.35
NetSTM32Dongle_5: STM32Dongle.5
NetSTM32Dongle_17: STM32Dongle.17
NetSTM32Dongle_21: STM32Dongle.21
NetSTM32Dongle_22: STM32Dongle.22
NetSTM32Dongle_23: STM32Dongle.23
NetSTM32Dongle_26: STM32Dongle.26
NetSTM32Dongle_27: STM32Dongle.27
NetSTM32Dongle_29: STM32Dongle.29
NetSTM32Dongle_30: STM32Dongle.30
NetToggle_3: 
NetU6_4: U6.4
NetU6_8: U6.8
NetU6_9: U6.9
NetU7_2: U7.2
NetU7_3: U7.3
NetU7_4: U7.4
NetU7_5: U7.5
NetU7_6: U7.6
NetU7_7: U7.7
NetU7_8: U7.8
NRST: P3.5 STM32Dongle.7
PHASE0_U_motordriver0: C15_U_motordriver0.1 U4_U_motordriver0.6
PHASE0_U_motordriver1: C15_U_motordriver1.1 U4_U_motordriver1.6
PHASE0_U_motordriver2: C15_U_motordriver2.1 U4_U_motordriver2.6
PHASE0_U_motordriver3: C15_U_motordriver3.1 U4_U_motordriver3.6
PHASE0_U_motordriver4: C15_U_motordriver4.1 U4_U_motordriver4.6
PHASE1_U_motordriver0: C16_U_motordriver0.2 U5_U_motordriver0.6
PHASE1_U_motordriver1: C16_U_motordriver1.2 U5_U_motordriver1.6
PHASE1_U_motordriver2: C16_U_motordriver2.2 U5_U_motordriver2.6
PHASE1_U_motordriver3: C16_U_motordriver3.2 U5_U_motordriver3.6
PHASE1_U_motordriver4: C16_U_motordriver4.2 U5_U_motordriver4.6
PHASE2_U_motordriver0: C17_U_motordriver0.2 U13_U_motordriver0.6
PHASE2_U_motordriver1: C17_U_motordriver1.2 U13_U_motordriver1.6
PHASE2_U_motordriver2: C17_U_motordriver2.2 U13_U_motordriver2.6
PHASE2_U_motordriver3: C17_U_motordriver3.2 U13_U_motordriver3.6
PHASE2_U_motordriver4: C17_U_motordriver4.2 U13_U_motordriver4.6
SD_CD: P1.10 STM32Dongle.41
SD_CK: P1.5 STM32Dongle.53
SD_CMD: P1.3 STM32Dongle.54
SD_D0: P1.7
SD_D1: P1.8
SD_D2: P1.1
SD_D3: P1.2
SENSOR0: U47.6
SENSOR1: U47.4
SENSOR2: U47.2
SW1: DIP6.2@10515.71,10640
SW2: DIP6.3@10515.71,10540
SW2C: 1k.2@12671,12040 C1.1 C5.1 C12_U_motordriver0.1 C12_U_motordriver1.1 C12_U_motordriver2.1 C12_U_motordriver3.1 C12_U_motordriver4.1 C13_U_motordriver0.1 C13_U_motordriver1.1 C13_U_motordriver2.1 C13_U_motordriver3.1 C13_U_motordriver4.1 C22.1 C22.2 C24.P1 C24.P2 C25.P1 C26.P1 C26.P2 C27.P1 C28.P1 C28.P2 C29.P1 C30.P1 C30.P2 C31.P1 C32.P1 C32.P2 C33.P1 C33.P2 C34.P1 C34.P2 C35.P1 C35.P2 C36.1 C36.2 C37.P1 C37.P2 C38.1 C38.2 C39.P1 C39.P2 C40.1 C40.2 C41.P1 C41.P2 C42.1 C42.2 C43.1 C43.2 C44.1 C44.2 C45.1 C45.2 C46.1 C46.2 C47.1 C47.2 C48.1 C49.2 C50.1 C50.2 C57.In C60.1 C60.2 C73.1 C74.1 C76.1 C77.1 C77.2 C78.P1 C78.P2 C79.1 C79.2 C80.2 C81.1 C81.2 C82.P1 C82.P2 C83.1 C83.2 C84.2 C85.1 C85.2 C86.1 C86.2 C87.2 C89.1 C89.2 D16.2 D18.2 D19.2 D20.2 D23.P2 DIP6.7@10854.29,10240 DIP6.8@10854.29,10340 DIP6.9@10854.29,10440 DIP6.10@10854.29,10540 DIP6.11@10854.29,10640 DIP6.12@13134.29,11955 P1.4 P1.6 P1.9 P2.55 P2.57 P2.59 P3.1 P3.3 P4.4 P4.5 P7.1 P14.5 P18.3 P18.4 P18.9 P18.10 P18.12 Q14.2 Q15.2 R4.1 R7.1 R8.1 R39.1 R45.2 R50.2 R54.2 R55.2 R56.2 R58.2 STM32Dongle.1 STM32Dongle.12 STM32Dongle.13 STM32Dongle.18 STM32Dongle.19 STM32Dongle.28 STM32Dongle.32 STM32Dongle.48 STM32Dongle.63 STM32Dongle.64 U4_U_motordriver0.4 U4_U_motordriver1.4 U4_U_motordriver2.4 U4_U_motordriver3.4 U4_U_motordriver4.4 U5_U_motordriver0.4 U5_U_motordriver1.4 U5_U_motordriver2.4 U5_U_motordriver3.4 U5_U_motordriver4.4 U6.2 U6.3 U6.6 U6.10 U6.11 U7.1 U7.10 U7.11 U7.12 U11.2 U13_U_motordriver0.4 U13_U_motordriver1.4 U13_U_motordriver2.4 U13_U_motordriver3.4 U13_U_motordriver4.4 U47.9 U47.11 U47.14 U?.2 U?.3 U?.6 U?.7
SW3: DIP6.4@10515.71,10440
SW4: DIP6.5@10515.71,10340
SW5: DIP6.6@10515.71,10240
SWDCK: P3.2 STM32Dongle.49
SWDIO: P3.4 STM32Dongle.46
USB_B_DP: P4.3 STM32Dongle.45
VCAP1: C80.1 STM32Dongle.31
VOUT_2: C5.2 C25.P2 C27.P2 C29.P2 C31.P2
pads on no net: 1k.1@12599,12040 C3.In C3.Out C11_U_motordriver0.2 C11_U_motordriver1.2 C11_U_motordriver2.2 C11_U_motordriver3.2 C11_U_motordriver4.2 C15_U_motordriver0.2 C15_U_motordriver1.2 C15_U_motordriver2.2 C15_U_motordriver3.2 C15_U_motordriver4.2 C16_U_motordriver0.1 C16_U_motordriver1.1 C16_U_motordriver2.1 C16_U_motordriver3.1 C16_U_motordriver4.1 C17_U_motordriver0.1 C17_U_motordriver1.1 C17_U_motordriver2.1 C17_U_motordriver3.1 C17_U_motordriver4.1 C18_U_motordriver0.In C18_U_motordriver0.Out C18_U_motordriver1.In C18_U_motordriver1.Out C18_U_motordriver2.In C18_U_motordriver2.Out C18_U_motordriver3.In C18_U_motordriver3.Out C18_U_motordriver4.In C18_U_motordriver4.Out C21.In C21.Out C48.2 C49.1 C76.2 C87.1 C88.In C88.Out D21.P1 D21.P2 D22.P1 D22.P2 D23.P1 DIP6.1 DIP6.2@12795.71,11855 DIP6.3@12795.71,11755 DIP6.4@12795.71,11655 DIP6.5@12795.71,11555 DIP6.6@12795.71,11455 DIP6.7@13134.29,11455 DIP6.8@13134.29,11555 DIP6.9@13134.29,11655 DIP6.10@13134.29,11755 DIP6.11@13134.29,11855 DIP6.12@10854.29,10740 P2.32 P2.34 P2.36 P2.53 P3.6 P14.1 P14.2 P14.3 P18.7 Q4_U_motordriver0.D1 Q4_U_motordriver0.D1A Q4_U_motordriver0.D2 Q4_U_motordriver0.D2A Q4_U_motordriver0.G1 Q4_U_motordriver0.G2 Q4_U_motordriver0.S1 Q4_U_motordriver0.S2 Q4_U_motordriver1.D1 Q4_U_motordriver1.D1A Q4_U_motordriver1.D2 Q4_U_motordriver1.D2A Q4_U_motordriver1.G1 Q4_U_motordriver1.G2 Q4_U_motordriver1.S1 Q4_U_motordriver1.S2 Q4_U_motordriver2.D1 Q4_U_motordriver2.D1A Q4_U_motordriver2.D2 Q4_U_motordriver2.D2A Q4_U_motordriver2.G1 Q4_U_motordriver2.G2 Q4_U_motordriver2.S1 Q4_U_motordriver2.S2 Q4_U_motordriver3.D1 Q4_U_motordriver3.D1A Q4_U_motordriver3.D2 Q4_U_motordriver3.D2A Q4_U_motordriver3.G1 Q4_U_motordriver3.G2 Q4_U_motordriver3.S1 Q4_U_motordriver3.S2 Q4_U_motordriver4.D1 Q4_U_motordriver4.D1A Q4_U_motordriver4.D2 Q4_U_motordriver4.D2A Q4_U_motordriver4.G1 Q4_U_motordriver4.G2 Q4_U_motordriver4.S1 Q4_U_motordriver4.S2 Q5_U_motordriver0.D1 Q5_U_motordriver0.D1A Q5_U_motordriver0.D2 Q5_U_motordriver0.D2A Q5_U_motordriver0.G1 Q5_U_motordriver0.G2 Q5_U_motordriver0.S1 Q5_U_motordriver0.S2 Q5_U_motordriver1.D1 Q5_U_motordriver1.D1A Q5_U_motordriver1.D2 Q5_U_motordriver1.D2A Q5_U_motordriver1.G1 Q5_U_motordriver1.G2 Q5_U_motordriver1.S1 Q5_U_motordriver1.S2 Q5_U_motordriver2.D1 Q5_U_motordriver2.D1A Q5_U_motordriver2.D2 Q5_U_motordriver2.D2A Q5_U_motordriver2.G1 Q5_U_motordriver2.G2 Q5_U_motordriver2.S1 Q5_U_motordriver2.S2 Q5_U_motordriver3.D1 Q5_U_motordriver3.D1A Q5_U_motordriver3.D2 Q5_U_motordriver3.D2A Q5_U_motordriver3.G1 Q5_U_motordriver3.G2 Q5_U_motordriver3.S1 Q5_U_motordriver3.S2 Q5_U_motordriver4.D1 Q5_U_motordriver4.D1A Q5_U_motordriver4.D2 Q5_U_motordriver4.D2A Q5_U_motordriver4.G1 Q5_U_motordriver4.G2 Q5_U_motordriver4.S1 Q5_U_motordriver4.S2 Q6_U_motordriver0.D1 Q6_U_motordriver0.D1A Q6_U_motordriver0.D2 Q6_U_motordriver0.D2A Q6_U_motordriver0.G1 Q6_U_motordriver0.G2 Q6_U_motordriver0.S1 Q6_U_motordriver0.S2 Q6_U_motordriver1.D1 Q6_U_motordriver1.D1A Q6_U_motordriver1.D2 Q6_U_motordriver1.D2A Q6_U_motordriver1.G1 Q6_U_motordriver1.G2 Q6_U_motordriver1.S1 Q6_U_motordriver1.S2 Q6_U_motordriver2.D1 Q6_U_motordriver2.D1A Q6_U_motordriver2.D2 Q6_U_motordriver2.D2A Q6_U_motordriver2.G1 Q6_U_motordriver2.G2 Q6_U_motordriver2.S1 Q6_U_motordriver2.S2 Q6_U_motordriver3.D1 Q6_U_motordriver3.D1A Q6_U_motordriver3.D2 Q6_U_motordriver3.D2A Q6_U_motordriver3.G1 Q6_U_motordriver3.G2 Q6_U_motordriver3.S1 Q6_U_motordriver3.S2 Q6_U_motordriver4.D1 Q6_U_motordriver4.D1A Q6_U_motordriver4.D2 Q6_U_motordriver4.D2A Q6_U_motordriver4.G1 Q6_U_motordriver4.G2 Q6_U_motordriver4.S1 Q6_U_motordriver4.S2 R3.1 R43.2 STM32Dongle.4 STM32Dongle.6 STM32Dongle.8 STM32Dongle.9 STM32Dongle.14 STM32Dongle.15 STM32Dongle.20 STM32Dongle.33 STM32Dongle.37 STM32Dongle.38 STM32Dongle.39 STM32Dongle.40 STM32Dongle.50 STM32Dongle.51 STM32Dongle.52 STM32Dongle.56 STM32Dongle.57 STM32Dongle.58 STM32Dongle.59 STM32Dongle.60 U4_U_motordriver0.1 U4_U_motordriver1.1 U4_U_motordriver2.1 U4_U_motordriver3.1 U4_U_motordriver4.1 U5_U_motordriver0.1 U5_U_motordriver0.5 U5_U_motordriver1.1 U5_U_motordriver1.5 U5_U_motordriver2.1 U5_U_motordriver2.5 U5_U_motordriver3.1 U5_U_motordriver3.5 U5_U_motordriver4.1 U5_U_motordriver4.5 U6.1 U6.12 U7.9 U13_U_motordriver0.7 U13_U_motordriver1.7 U13_U_motordriver2.7 U13_U_motordriver3.7 U13_U_motordriver4.7 U25.1 U25.2 U25.3 U25.4 U25.5 U25.6 U25.8 U25.9 U25.10 U25.11 U25.12 U25.13 U25.14 U25.15 U25.16 U47.1 U47.8 U47.10 U47.12 U47.13 U47.15 U47.16 U?.1 U?.5 U?.8 U?.P1 U?.P2 U?.P3 U?.P4 U?.P5 U?.P6 U?.P7 U?.P8 U?.P9 U?.P10 U?.P11 U?.P12 U?.P13 U?.P14 U?.P15 U?.P16 U?.P17 U?.P18 U?.P19 U?.P20 U?.P21 U?.P22 U?.P23 U?.P24 U?.P25 U?.P26 U?.P27 U?.P28 U?.P29 U?.P30 U?.P31 U?.P32 U?.P33 U?.P34 U?.P35 U?.P36 U?.P37 U?.P38 U?.P39 U?.P40 U?.P41 U?.P42 U?.P43 U?.P44 U?.P45 U?.P46 U?.P47 U?.P48 U?.P49 U?.P50 U?.P51 U?.P52 U?.P53 U?.P54 U?.P55 U?.P56 U?.P57 U?.P58 U?.P59 U?.P60 U?.P61 U?.P62 U?.P63 U?.P64 U?.P65 U?.P66 U?.P67 U?.P68 U?.P69 U?.P70 U?.P71 U?.P72 U?.P73 U?.P74 U?.P75 U?.P76 U?.P77 U?.P78 U?.P79 U?.P80 U?.P81 U?.P82 U?.P83 U?.P84 U?.P85 U?.P86 U?.P87 U?.P88 U?.P89 U?.P90 U?.P91 U?.P92 U?.P93 U?.P94 U?.P95 U?.P96 U?.P97 U?.P98 U?.P99 U?.P100 U?.P101 U?.P102 U?.P103 U?.P104 U?.P105 U?.P106 U?.P107 U?.P108 U?.P109 U?.P110 U?.P111 U?.P112 U?.P113 U?.P114 U?.P115 U?.P116 U?.P117 U?.P118 U?.P119 U?.P120 U?.P121 U?.P122 U?.P123 U?.P124 U?.P125 U?.P126 U?.P127 U?.P128 U?.P129 U?.P130 U?.P131 U?.P132 U?.P133 U?.P134 U?.P135 U?.P136 U?.P137 U?.P138 U?.P139 U?.P140 U?.P141 U?.P142 U?.P143 U?.P144

## Text inside footprints (layer, text, board x,y; h text height)
DIP6: Top Overlay "1" at 13039.8,11834.92 h39.37; Top Overlay "2" at 13039.8,11736.5 h39.37; Top Overlay "3" at 13043.74,11634.13 h39.37; Top Overlay "4" at 13039.8,11535.71 h39.37; Top Overlay "5" at 13047.68,11437.28 h39.37; Top Overlay "Battery" at 12835.08,11370.35 h39.37
DIP6: Top Overlay "Boot0" at 10598.39,10714.41 h39.37; Top Overlay "1" at 10759.8,10619.92 h39.37; Top Overlay "2" at 10759.8,10521.5 h39.37; Top Overlay "3" at 10763.74,10419.13 h39.37; Top Overlay "4" at 10759.8,10320.71 h39.37; Top Overlay "5" at 10767.68,10222.28 h39.37; Top Overlay "Battery" at 10555.08,10155.35 h39.37
P2: Top Overlay "2" at 7125,4670 h50 r90; Top Overlay "1" at 7225,4670 h50 r90; Top Overlay "59" at 7225,7750 h50 r90; Top Overlay "60" at 7125,7750 h50 r90; Bottom Overlay "1" at 7225,2570 h50 r90
P18: Top Overlay "12" at 7320,8695 h50 r90; Top Overlay "1" at 7420,8735 h50 r90; Top Overlay "1" at 7420,8695 h50 r90; Top Overlay "1" at 7420,8015 h50 r90; Top Overlay "2" at 7320,8015 h50 r90
U4_U_motordriver0: Top Overlay "*" at 17932.59,13924.64 h73.82 r90; Mechanical 1 "*" at 17932.79,13924.92 h73.82 r90
U4_U_motordriver1: Top Overlay "*" at 17732.59,14414.64 h73.82 r90; Mechanical 1 "*" at 17732.79,14414.92 h73.82 r90
U4_U_motordriver2: Top Overlay "*" at 17932.59,14904.64 h73.82 r90; Mechanical 1 "*" at 17932.79,14904.92 h73.82 r90
U4_U_motordriver3: Top Overlay "*" at 17932.59,15394.64 h73.82 r90; Mechanical 1 "*" at 17932.79,15394.92 h73.82 r90
U4_U_motordriver4: Top Overlay "*" at 17932.59,15884.64 h73.82 r90; Mechanical 1 "*" at 17932.79,15884.92 h73.82 r90
U5_U_motordriver0: Top Overlay "*" at 14732.59,13924.64 h73.82 r90; Mechanical 1 "*" at 14732.79,13924.92 h73.82 r90
U5_U_motordriver1: Top Overlay "*" at 14592.59,14414.64 h73.82 r90; Mechanical 1 "*" at 14592.79,14414.92 h73.82 r90
U5_U_motordriver2: Top Overlay "*" at 14732.59,14904.64 h73.82 r90; Mechanical 1 "*" at 14732.79,14904.92 h73.82 r90
U5_U_motordriver3: Top Overlay "*" at 14732.59,15394.64 h73.82 r90; Mechanical 1 "*" at 14732.79,15394.92 h73.82 r90
U5_U_motordriver4: Top Overlay "*" at 14732.59,15884.64 h73.82 r90; Mechanical 1 "*" at 14732.79,15884.92 h73.82 r90
U7: Mechanical 1 "PCB EDGE" at 8424.44,2025.99 h73.82
U13_U_motordriver0: Top Overlay "*" at 9282.59,13924.64 h73.82 r90; Mechanical 1 "*" at 9282.79,13924.92 h73.82 r90
U13_U_motordriver1: Top Overlay "*" at 9242.59,14414.64 h73.82 r90; Mechanical 1 "*" at 9242.79,14414.92 h73.82 r90
U13_U_motordriver2: Top Overlay "*" at 9282.59,14904.64 h73.82 r90; Mechanical 1 "*" at 9282.79,14904.92 h73.82 r90
U13_U_motordriver3: Top Overlay "*" at 9282.59,15394.64 h73.82 r90; Mechanical 1 "*" at 9282.79,15394.92 h73.82 r90
U13_U_motordriver4: Top Overlay "*" at 9282.59,15884.64 h73.82 r90; Mechanical 1 "*" at 9282.79,15884.92 h73.82 r90